# EAGLE board usb-100basefx (EAGLE 6.3)
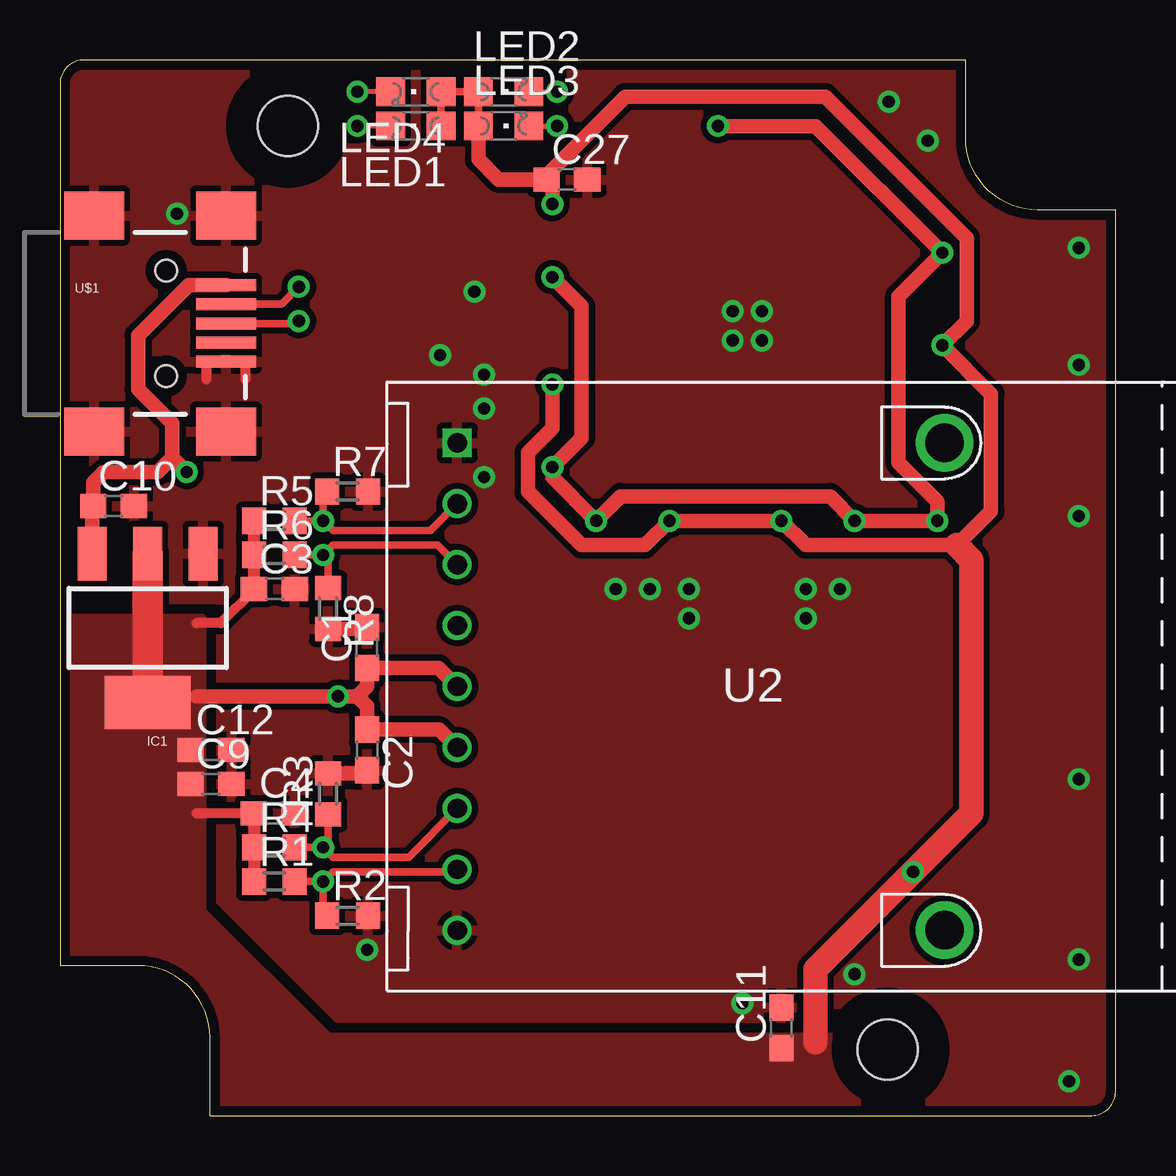
[diagram p0: board, top side]
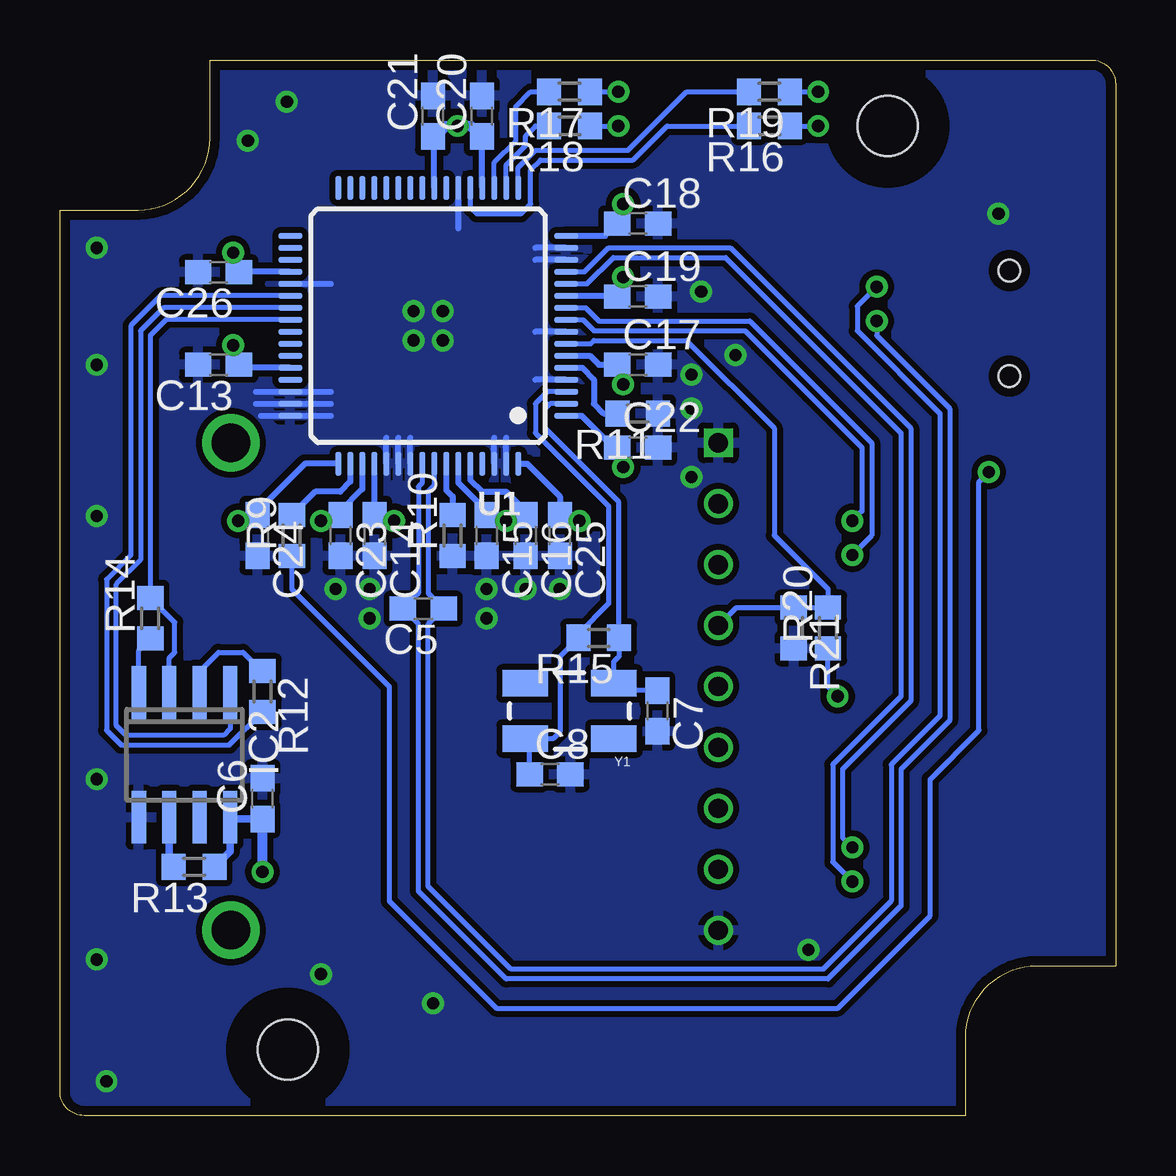
[diagram p1: board, bottom side, seen from below]

Size 44 x 44 mm. Coordinates in mm from the lower left corner, seen from the top.
Copper layers (1*16): Top 0.035mm / dielectric 1.5mm / Bottom 0.035mm
Design rules "cm *": minimum track width 8mil, minimum drill 20mil, track to track 8mil, track to pad 8mil, pad to pad 8mil, via to via 8mil, smd to smd 8mil, copper to edge 16mil, drill to drill 8mil, minimum pad ring 8mil, minimum via ring 8mil, stop-mask expansion 4mil, vias tented up to drill 20mil, thermal gap 10mil

## Footprints (pad centres in the part's own frame; a part is rotated, then mirrored left to right if it is on the bottom)
1551R = hole 2.5: 34.5,2.75; 9.5,41.25
C0603 = smd 1.1 x 1: 1 -0.85,0; 2 0.85,0
SOT223 = smd 1.219 x 2.235: 1 -2.311,-3.099; 2 0,-3.099; 3 2.311,-3.099 | smd 3.6 x 2.2: 4 0,3.099
SO-08 = smd 0.6 x 2.2: 1 -1.905,-2.6; 2 -0.635,-2.6; 3 0.635,-2.6; 4 1.905,-2.6; 5 1.905,2.6; 6 0.635,2.6; 7 -0.635,2.6; 8 -1.905,2.6
CHIPLED_0805 = smd 1.2 x 1.2: A 0,-1.05; C 0,1.05
R0603 = smd 1 x 1.1: 1 -0.85,0; 2 0.85,0
LQFP64 = smd 0.25 x 1: 1 -3.75,-5.75; 2 -3.25,-5.75; 3 -2.75,-5.75; 4 -2.25,-5.75; 5 -1.75,-5.75; 6 -1.25,-5.75; 7 -0.75,-5.75; 8 -0.25,-5.75; 9 0.25,-5.75; 10 0.75,-5.75; 11 1.25,-5.75; 12 1.75,-5.75; 13 2.25,-5.75; 14 2.75,-5.75; 15 3.25,-5.75; 16 3.75,-5.75; 33 3.75,5.75; 34 3.25,5.75; 35 2.75,5.75; 36 2.25,5.75; 37 1.75,5.75; 38 1.25,5.75; 39 0.75,5.75; 40 0.25,5.75; 41 -0.25,5.75; 42 -0.75,5.75; 43 -1.25,5.75; 44 -1.75,5.75; 45 -2.25,5.75; 46 -2.75,5.75; 47 -3.25,5.75; 48 -3.75,5.75 | smd 1 x 0.25: 17 5.75,-3.75; 18 5.75,-3.25; 19 5.75,-2.75; 20 5.75,-2.25; 21 5.75,-1.75; 22 5.75,-1.25; 23 5.75,-0.75; 24 5.75,-0.25; 25 5.75,0.25; 26 5.75,0.75; 27 5.75,1.25; 28 5.75,1.75; 29 5.75,2.25; 30 5.75,2.75; 31 5.75,3.25; 32 5.75,3.75; 49 -5.75,3.75; 50 -5.75,3.25; 51 -5.75,2.75; 52 -5.75,2.25; 53 -5.75,1.75; 54 -5.75,1.25; 55 -5.75,0.75; 56 -5.75,0.25; 57 -5.75,-0.25; 58 -5.75,-0.75; 59 -5.75,-1.25; 60 -5.75,-1.75; 61 -5.75,-2.25; 62 -5.75,-2.75; 63 -5.75,-3.25; 64 -5.75,-3.75
AFBR-5803Z = drill 0.8 square: 1 -16.765,10.16 | drill 0.8: 2 -16.765,7.62; 3 -16.765,5.08; 4 -16.765,2.54; 5 -16.765,0; 6 -16.765,-2.54; 7 -16.765,-5.08; 8 -16.765,-7.62; 9 -16.765,-10.16 | drill 1.6: P$1 3.55,10.16; P$2 3.55,-10.16
USB-MINIB = smd 2.5 x 0.5: D+ 2.5,0; D- 2.5,0.8; GND 2.5,-1.6; ID 2.5,-0.8; VBUS 2.5,1.6 | smd 2.5 x 2: MTN1 -3,4.5; MTN2 2.5,4.5; MTN3 -3,-4.5; MTN4 2.5,-4.5 | hole 0.9: 0,2.2; 0,-2.2
CRYSTAL-SMD-5X3 = smd 1.9 x 1.1: 1 -1.85,-1.15; 2 1.85,-1.15; 3 1.85,1.15; 4 -1.85,1.15

## Placement (x,y rotation side)
BOX1  HAMMOND-BOX-R  [1551R]  0,0 0 top
C1  1u  [C0603]  12.8,19.51 90 top
C2  1u  [C0603]  12.8,15.24 270 top
C3  1u  [C0603]  8.94,21.95 0 top
C4  1u  [C0603]  8.94,12.6 0 top
C5  3p3  [C0603]  28.85,21.13 180 bottom
C6  1u  [C0603]  35.56,13.21 90 bottom
C7  18p  [C0603]  19.1,16.87 270 bottom
C8  18p  [C0603]  23.57,14.22 0 bottom
C9  .1u  [C0603]  6.3,13.82 0 top
C10  .1u  [C0603]  2.24,25.4 0 top
C11  .1u  [C0603]  30.07,3.66 90 top
C12  .1u  [C0603]  6.3,15.24 0 top
C13  .1u  [C0603]  37.39,31.29 180 bottom
C14  .1u  [C0603]  30.89,24.18 270 bottom
C15  .1u  [C0603]  26.21,24.18 270 bottom
C16  .1u  [C0603]  24.59,24.18 270 bottom
C17  .1u  [C0603]  19.91,31.29 0 bottom
C18  .1u  [C0603]  19.91,37.19 0 bottom
C19  .1u  [C0603]  19.91,34.14 0 bottom
C20  .1u  [C0603]  26.42,41.66 90 bottom
C21  .1u  [C0603]  28.45,41.66 90 bottom
C22  .1u  [C0603]  19.91,27.84 0 bottom
C23  .1u  [C0603]  32.31,24.18 270 bottom
C24  .1u  [C0603]  35.76,24.18 270 bottom
C25  .1u  [C0603]  23.16,24.18 270 bottom
C26  .1u  [C0603]  37.39,35.15 180 bottom
C27  .1u  [C0603]  21.13,39.01 0 top
IC1  LD33  [SOT223]  3.66,20.32 180 top
IC2  93LC66SN  [SO-08]  38.81,15.04 180 bottom
LED1  [CHIPLED_0805]  14.83,41.25 90 top
LED2  [CHIPLED_0805]  18.49,42.67 270 top
LED3  [CHIPLED_0805]  18.49,41.25 270 top
LED4  [CHIPLED_0805]  14.83,42.67 90 top
R1  130  [R0603]  8.94,9.75 0 top
R2  82  [R0603]  11.99,8.33 0 top
R3  82  [R0603]  11.18,13.41 90 top
R4  130  [R0603]  8.94,11.18 0 top
R5  130  [R0603]  8.94,24.79 0 top
R6  130  [R0603]  8.94,23.37 0 top
R7  82  [R0603]  11.99,26.01 0 top
R8  82  [R0603]  11.18,21.13 270 top
R9  4k7  [R0603]  34.34,24.18 90 bottom
R10  12k1  [R0603]  27.64,24.18 90 bottom
R11  12k1  [R0603]  19.91,29.26 180 bottom
R12  22  [R0603]  35.56,17.68 270 bottom
R13  4k7  [R0603]  38.4,10.36 180 bottom
R14  22  [R0603]  40.23,20.73 90 bottom
R15  1M  [R0603]  21.54,19.91 180 bottom
R16  330  [R0603]  14.43,41.25 180 bottom
R17  330  [R0603]  22.76,42.67 180 bottom
R18  330  [R0603]  22.76,41.25 180 bottom
R19  330  [R0603]  14.43,42.67 180 bottom
R20  130  [R0603]  11.99,20.32 90 bottom
R21  82  [R0603]  13.41,20.32 270 bottom
U1  AX88772B  [LQFP64]  28.65,32.92 90 bottom
U2  AFBR-5803Z  [AFBR-5803Z]  33.32,17.88 0 top
U$1  USB-MINIB-5PIN  [USB-MINIB]  4.42,33.02 0 top
Y1  25MHz  [CRYSTAL-SMD-5X3]  22.76,16.87 180 bottom

## Library data of the parts
BOX1 = hammond
C1-C27 R1-R21 = rcl
IC1 = SparkFun-PowerIC
IC2 = microchip; MF: MICROCHIP; MPN: 93LC66/SN; OC_FARNELL: 1296586; OC_NEWARK: 65K1154
LED1-LED4 = led
U1 U2 = balto
U$1 = SparkFun-Connectors
Y1 = SparkFun-FreqCtrl

## Nets
EE_CLK: IC2.2 R12.1
EE_CS: IC2.1 U1.39
EE_DI: IC2.3 R14.2 U1.40
EE_DO: IC2.4 R14.1
GND: C1.2 C2.2 C3.2 C4.2 C6.2 C7.2 C8.2 C9.2 C10.2 C11.2 C12.2 C13.2 C14.2 C15.2 C16.2 C17.2 C18.2 C19.2 C20.2 C21.2 C22.2 C23.2 C24.2 C25.2 C26.2 C27.2 IC1.1 IC2.5 R2.2 R3.2 R7.2 R8.2 R10.1 R11.1 R21.2 U1.4 U1.8 U1.14 U1.15 U1.22 U1.37 U1.46 U1.47 U1.48 U1.53 U1.54 U1.55 U1.62 U1.63 U2.1 U2.9 U$1.GND U$1.MTN1 U$1.MTN2 U$1.MTN3 U$1.MTN4
LED1: R16.2 U1.21
LED2: R17.2 U1.19
LED3: R18.2 U1.18
LED4: R19.2 U1.17
N$1: R9.2 U1.50
N$2: R10.2 U1.58
N$3: R11.2 U1.5
N$4: R12.2 U1.38
N$5: IC2.6 R13.2
N$7: LED1.C R16.1
N$8: LED2.C R17.1
N$9: LED3.C R18.1
N$10: LED4.C R19.1
RD_DN: R6.2 R8.1 U1.10 U2.3
RD_DP: R5.2 R7.1 U1.9 U2.2
SD: R20.2 R21.1 U1.7 U2.4
TD_DN: R3.1 R4.2 U1.13 U2.7
TD_DP: R1.2 R2.1 U1.12 U2.8
USB_DM: C5.1 U1.57 U$1.D-
USB_DP: C5.2 U1.56 U$1.D+
USB_VIN: C10.1 IC1.3 R9.1 U$1.VBUS
VCC: C1.1 C2.1 C3.1 C4.1 C6.1 C9.1 C11.1 C12.1 C13.1 C14.1 C15.1 C16.1 C17.1 C18.1 C27.1 IC1.2 IC1.4 IC2.8 LED1.A LED2.A LED3.A LED4.A R1.1 R4.1 R5.1 R6.1 R13.1 R20.1 U1.6 U1.16 U1.44 U1.52 U1.59 U1.60 U2.5 U2.6
VDD: C19.1 C20.1 C21.1 C22.1 C23.1 C24.1 C25.1 C26.1 U1.1 U1.11 U1.20 U1.24 U1.36 U1.49 U1.51 U1.64
XTAL1: C7.1 R15.1 U1.2 Y1.1
XTAL2: C8.1 R15.2 U1.3 Y1.3

## Tracks (layer width: path | path; a pad name or v marks a point on that pad's centre or on a via)
EE_CLK
  Bottom 0.203: IC2.2 38.18,18.52 37.39,19.3 36.37,19.3 35.6,18.53 R12.1
EE_CS
  Bottom 0.203: U1.39 39.69,33.67 40.64,32.72 40.64,23.16 41.66,22.15 41.66,16.26 41.25,15.85 37.19,15.85 36.91,16.13 IC2.1
EE_DI
  Bottom 0.203: IC2.3 39.45,19.07 39.22,19.3 39.22,20.56 R14.2 40.23,32.51 39.58,33.17 U1.40
EE_DO
  Bottom 0.203: IC2.4 40.72,19.39 R14.1
GND  (via drill 0.51)
  Top 0.406: 7.72,30.68 7.72,31.42 U$1.GND 6.1,31.42 6.1,30.68
  Top 0.61: R3.2 12.67,14.26 C2.2 | R8.2 12.73,20.28 C1.2
  Bottom 0.254: U1.62 25.9,28.25 | U1.63 25.4,28.25 | U1.55 29.4,28.25 | U1.54 29.9,28.25 | U1.53 30.4,28.25 | U1.4 24.18,30.67 | U1.8 24.18,32.67 | U1.14 24.18,35.67 | U1.15 24.18,36.17 | U1.37 32.72,34.67 | U1.46 34.14,30.17 | 34.14,30.17 32.72,30.17 | U1.48 33.93,29.17 | 33.93,29.17 32.72,29.17 | U1.22 27.4,36.98 | U1.47 34.14,29.67 | 34.14,29.67 32.72,29.67 | 35.82,30.17 34.14,30.17 | 35.82,29.67 34.14,29.67 | 35.62,29.17 33.93,29.17
  other vias: 4.88,37.59 28.04,33.53 28.04,32.31 29.26,32.31 29.26,33.53 15.85,31.7 17.27,34.34 34.54,42.27 36.17,40.64 42.47,36.17 42.47,31.29 42.47,24.99 42.47,14.02 42.47,6.5 42.06,1.42 33.12,5.89 28.45,4.67 23.16,21.95 24.59,21.95 26.21,21.95 26.21,20.73 17.68,30.89 17.68,29.46 17.68,26.62 31.09,21.95 32.51,21.95 31.09,20.73 12.8,6.91
  pour Top (isolate 0.254): 44.91,-0.61 44.91,45.11 -0.61,45.11 -0.61,21.54 6.71,21.54 6.71,8.94 11.58,4.06 34.54,4.06 34.54,-0.61
  pour Bottom (isolate 0.254): -0.2,-0.2 44.5,-0.2 44.5,44.7 -0.2,44.7
LED1
  Bottom 0.203: U1.21 26.9,37.87 26.62,37.59 24.79,37.59 24.38,38 24.38,39.42 23.98,39.83 20.12,39.83 18.69,41.25 R16.2
LED2
  Bottom 0.203: U1.19 25.9,39.73 24.99,40.64 24.99,42.06 24.38,42.67 R17.2
LED3
  Bottom 0.203: U1.18 25.4,39.62 24.59,40.44 24.59,40.84 24.18,41.25 R18.2
LED4
  Bottom 0.203: U1.17 24.9,39.51 24.18,40.23 20.32,40.23 17.88,42.67 R19.2
N$1
  Bottom 0.254: U1.50 31.9,26.42 32.31,26.01 33.36,26.01 R9.2
N$2
  Bottom 0.254: U1.58 27.9,26.07 27.64,25.81 R10.2
N$3
  Bottom 0.254: U1.5 22.23,31.17 21.74,30.68 21.74,29.67 21.34,29.26 R11.2
N$4
  Bottom 0.203: U1.38 39.8,34.17 41.05,32.92 41.05,23.37 42.06,22.35 42.06,16.05 41.45,15.44 36.95,15.44 R12.2
N$5
  Bottom 0.305: IC2.6 39.45,10.55 R13.2
N$7  (via drill 0.51)
  Top 0.203: LED1.C v12.39,41.25
  Bottom 0.203: R16.1 v12.39,41.25
N$8  (via drill 0.51)
  Top 0.203: LED2.C v20.73,42.67
  Bottom 0.203: R17.1 v20.73,42.67
N$9  (via drill 0.51)
  Top 0.203: LED3.C v20.73,41.25
  Bottom 0.203: R18.1 v20.73,41.25
N$10  (via drill 0.51)
  Top 0.203: LED4.C v12.39,42.67
  Bottom 0.203: R19.1 v12.39,42.67
RD_DN  (via drill 0.51)
  Top 0.305: R6.2 v10.97,23.37 | v10.97,23.37 11.38,23.77 15.75,23.77 U2.3 | v10.97,23.37 11.18,23.16 R8.1
  Bottom 0.203: U1.10 22.09,33.67 21.54,33.12 15.24,33.12 10.16,28.04 10.16,24.18 v10.97,23.37
RD_DP  (via drill 0.51)
  Top 0.305: R5.2 v10.97,24.79 | v10.97,24.79 10.97,25.84 R7.1 | v10.97,24.79 11.38,24.38 15.44,24.38 U2.2
  Bottom 0.203: U1.9 22.2,33.17 21.74,32.72 15.44,32.72 10.57,27.84 10.57,25.2 v10.97,24.79
SD
  Bottom 0.203: U1.7 21.88,32.17 21.74,32.31 17.88,32.31 14.22,28.65 14.22,24.18 11.99,21.95 R20.2 R21.1 15.81,21.17 U2.4
TD_DN  (via drill 0.51)
  Top 0.305: R4.2 v10.97,11.18 | v10.97,11.18 11.38,10.77 14.53,10.77 U2.7 | v10.97,11.18 11.18,11.38 R3.1
  Bottom 0.203: U1.13 22.13,35.17 21.13,36.17 16.05,36.17 8.53,28.65 8.53,17.27 11.38,14.43 11.38,11.58 v10.97,11.18
TD_DP  (via drill 0.51)
  Top 0.305: R1.2 v10.97,9.75 | v10.97,9.75 10.97,8.5 R2.1 | v10.97,9.75 11.38,10.16 16.46,10.16 U2.8
  Bottom 0.203: U1.12 22.02,34.67 20.93,35.76 16.26,35.76 8.94,28.45 8.94,17.48 11.79,14.63 11.79,10.57 v10.97,9.75
USB_DM  (via drill 0.51)
  Top 0.305: U$1.D- 9.23,33.82 v9.96,34.54
  Bottom 0.203: U1.57 28.4,26.26 28.65,26.01 28.65,21.78 C5.1 28.65,20.49 28.65,9.55 25.2,6.1 12.19,6.1 9.35,8.94 9.35,14.63 7.32,16.66 7.32,29.26 10.77,32.72 10.77,33.73 v9.96,34.54
USB_DP  (via drill 0.51)
  Top 0.305: U$1.D+ 9.86,33.02 v9.96,33.12
  Bottom 0.203: U1.56 28.9,26.37 29.06,26.21 29.06,21.78 C5.2 29.06,20.49 29.06,9.35 25.4,5.69 11.99,5.69 8.94,8.74 8.94,14.43 6.91,16.46 6.91,29.46 9.96,32.51 v9.96,33.12
USB_VIN  (via drill 0.51)
  Top 0.61: U$1.VBUS 5.36,34.62 3.25,32.51 3.25,30.28 4.67,28.85 4.67,27.43 | IC1.3 1.35,25.36 C10.1 1.39,26.38 1.83,26.82 4.06,26.82 4.67,27.43 | 4.67,27.43 v5.28,26.82
  Bottom 0.203: R9.1 34.34,21.95 30.28,17.88 30.28,8.94 25.81,4.47 11.58,4.47 7.72,8.33 7.72,14.02 5.69,16.05 5.69,26.42 v5.28,26.82
VCC  (via drill 0.51)
  Top 0.305: 15.85,41.22 LED1.A LED4.A LED2.A LED3.A 17.48,41.22
  Top 0.406: C3.1 8.09,21.91 6.71,20.52 5.69,20.52 | C4.1 5.69,12.6
  Top 0.508: C3.1 R6.1 R5.1 | R1.1 R4.1 C4.1 8.13,12.64 | 20.52,38.77 C27.1
  Top 0.61: v20.52,30.48 20.52,28.65 19.51,27.64 19.51,26.01 21.74,23.77 24.38,23.77 v25.4,24.79 v30.07,24.79 31.09,23.77 37.39,23.77 38.81,25.2 38.81,30.07 v36.78,32.11 37.8,33.12 37.8,36.58 32.11,42.27 31.9,42.47 26.82,42.47 23.57,42.47 20.52,39.42 20.28,39.18 C27.1 18.29,39.01 17.44,39.86 LED3.A | 12.39,17.48 12.8,17.07 C2.1 15.81,16.09 U2.6 | 12.39,17.48 12.8,17.88 C1.1 15.78,18.66 U2.5 | v20.52,38 20.52,38.77 | 12.39,17.48 v11.58,17.48 5.69,17.48
  Top 1.016: 37.39,23.77 38,23.16 38,12.6 v35.56,10.16 31.5,6.1 31.5,3.05
  Top 1.27: IC1.2 IC1.4
  Bottom 0.203: C15.1 26.21,25.2 | 30.9,25.05 C14.1 | v11.58,17.48 11.99,17.88 R20.1
  Bottom 0.254: U1.44 36.41,31.17 C13.1 | U1.59 27.4,26.39 26.21,25.2 | U1.60 26.9,26.5 26.42,26.01 25.4,26.01 24.59,25.2 C16.1 24.83,24.79 | U1.52 30.9,25.05 | U1.6 21.91,31.67 21.54,31.29 C17.1 | U1.16 21.28,36.67 C18.1
  Bottom 0.305: C6.1 36.83,12.36 IC2.8 36.91,11.01 R13.1
  Bottom 0.406: 24.83,24.79 v25.4,24.79 25.97,24.79 C15.1 | 30.9,25.05 30.65,24.79 v30.07,24.79 | C17.1 20.52,31.05 v20.52,30.48 | C18.1 20.52,37.43 v20.52,38 | C13.1 36.78,31.53 v36.78,32.11 | v35.56,10.16 C6.1
  pour Top (no thermals): -0.61,20.73 5.89,20.73 5.89,8.53 11.18,3.25 33.73,3.25 33.73,-0.61 -0.61,-0.61
VDD  (via drill 0.51)
  Top 0.61: v20.52,34.95 21.74,33.73 21.74,28.25 v20.52,27.03 20.52,26.62 v22.35,24.79 23.37,25.81 32.11,25.81 v33.12,24.79 v36.58,24.79 36.58,25.6 34.95,27.23 34.95,34.14 v36.78,35.97 31.5,41.25 v27.43,41.25
  Bottom 0.203: C23.1 32.31,25.2 | 20.79,34.17 C19.1
  Bottom 0.254: U1.24 28.4,40.76 C21.1 | U1.20 26.4,40.79 C20.1 | U1.36 36.52,35.17 C26.1 | U1.51 31.4,26.1 32.31,25.2 | U1.64 24.53,27.17 23.16,25.81 C25.1 22.92,24.79 | U1.49 33.79,27.17 35.76,25.2 C24.1 36,24.79 | U1.11 20.79,34.17 | U1.1 22.26,29.17 20.93,27.84 C22.1
  Bottom 0.406: C20.1 26.86,41.25 v27.43,41.25 27.91,41.25 28.4,40.76 | C23.1 32.55,24.79 v33.12,24.79 | 36,24.79 v36.58,24.79 | v20.52,34.95 20.52,34.38 C19.1 | C22.1 20.52,27.6 v20.52,27.03 | 22.92,24.79 v22.35,24.79 | C26.1 36.78,35.39 v36.78,35.97
XTAL1
  Bottom 0.203: U1.2 23.57,29.67 23.77,29.46 23.77,28.65 20.73,25.6 20.73,19.95 R15.1 20.69,19.14 20.91,18.92 Y1.1 | C7.1 20.61,17.72 Y1.1 | 20.93,18.04 Y1.1
XTAL2
  Bottom 0.203: U1.3 23.68,30.17 24.18,29.67 24.18,28.45 21.13,25.4 21.13,21.34 22.39,20.08 R15.2 23.16,19.14 23.16,15.99 23.44,15.72 Y1.3 24.42,15.53 C8.1